# Altium PCB PCB2.PcbDoc
Units mm, origin at the board's own origin, x right, y up, seen from the top; angles counter-clockwise.
Board outline 90.17 x 60.07 mm, 2 copper layers (Top Layer, Bottom Layer); 25 components, 33 nets, 135 pads, 1 vias.
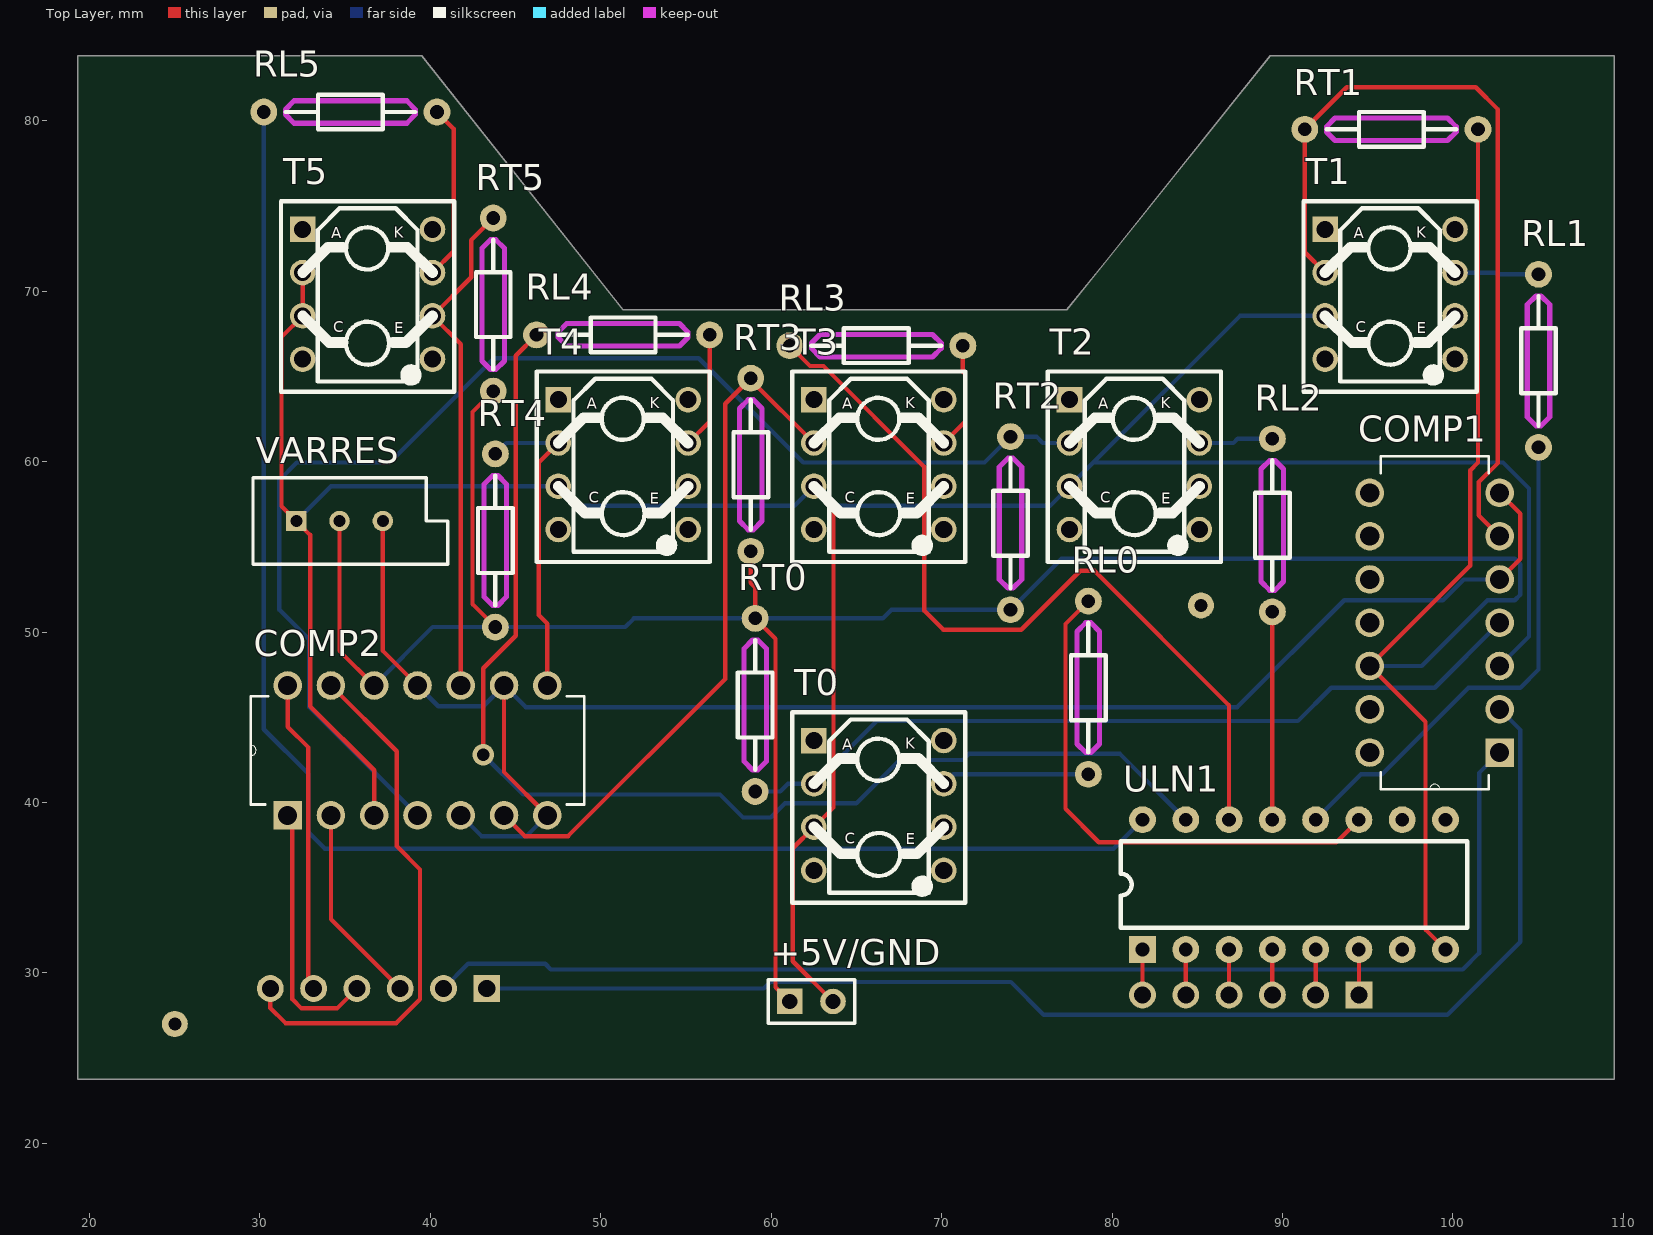
[diagram p0: Top Layer view]
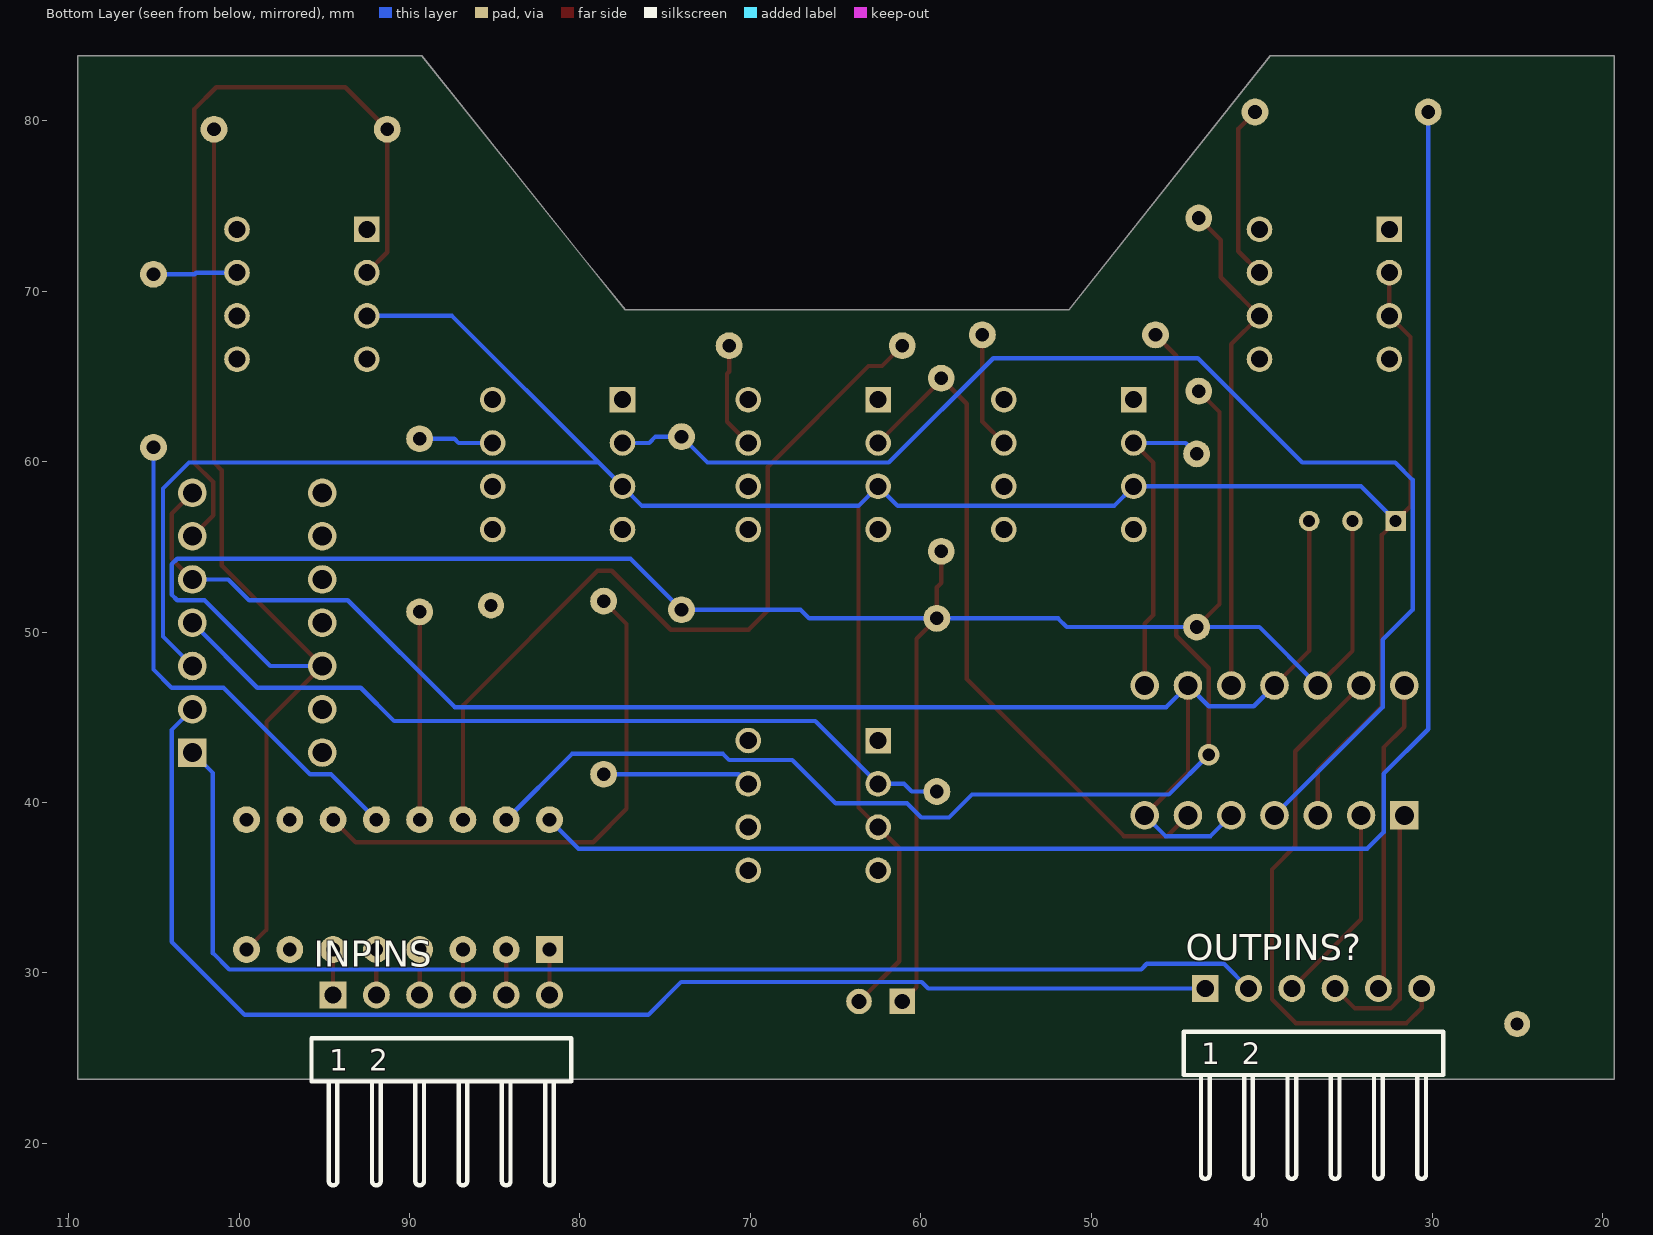
[diagram p1: Bottom Layer view, seen from below]
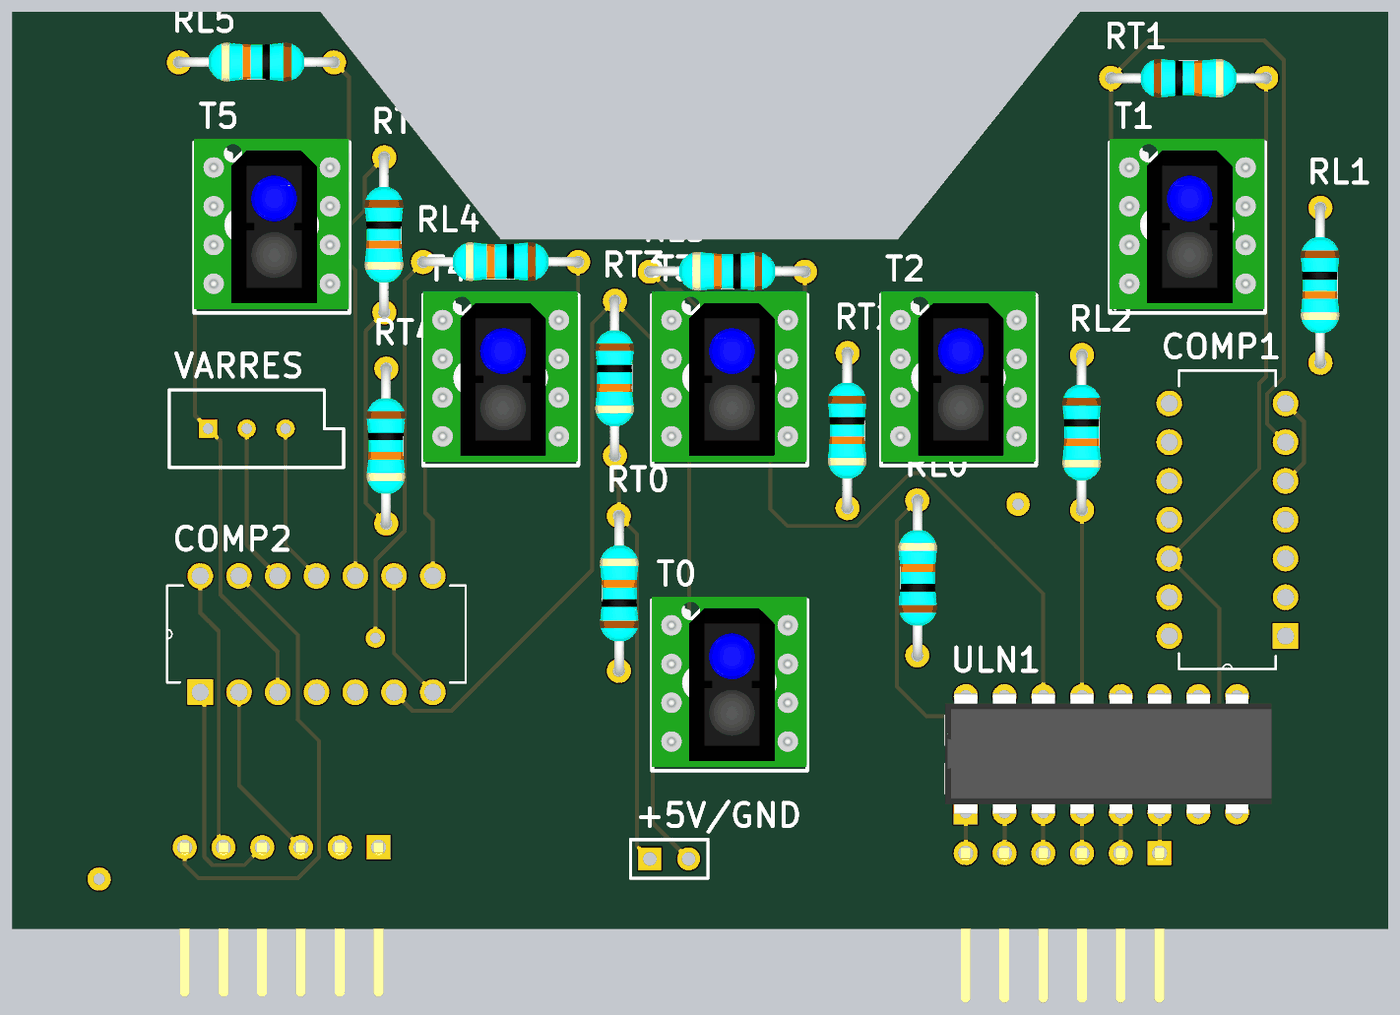
[diagram p2: 3D render of the assembled board from above, using the file's embedded part models]

## Layer stack, top to bottom
Top Solder: solder mask 0.0102, Solder Resist, Dk 3.5
Top Layer: signal copper 0.0356
Dielectric 1: dielectric 0.32, FR-4, Dk 4.8
Bottom Layer: signal copper 0.0356
Bottom Solder: solder mask 0.0102, Solder Resist, Dk 3.5

## Board outline
19.304,23.749 109.474,23.749 109.474,83.82 89.281,83.82 79.701,71.827 77.343,68.91 51.308,68.91 39.497,83.82 19.304,83.82

## Design rules (kind name [scope] priority, off if disabled: settings)
Clearance [All] p1: gap=0.254
PolygonConnect [All] p1: connectstyle=Relief reliefconductorwidth=0.254 reliefentries=4 polygonreliefangle="90 Angle" airgapwidth=0.254
RoomDefinition Sheet1 [InComponentClass('Sheet1')] p1: confinementstyle=ConfineIn formatcopy=TRUE lockcomponents=FALSE outline 19.304,78.486 244.983,78.486 244.983,102.743 19.304,102.743
RoutingVias [All] p1: holewidth=0.711 width=1.27 viastyle="Through Hole" minholewidth=0.711 minwidth=1.27 maxholewidth=0.711 maxwidth=1.27
SolderMaskExpansion [All] p1: expansion=0.102
Width [All] p1: maxlimit=0.254 minlimit=0.254 preferedwidth=0.254
30 further rules are at their usual default settings.

## Components (designator, comment, footprint, x,y, rotation, side; value= is the part's Value field where it differs from the comment)
+5V/GND "Header 2" HDR1X2 61.087,28.321 r0 top (schematic designator "Power Rail?")
COMP1 "LM339N" DIP254P762X508-14 95.123,58.166 r180 top
COMP2 "LM339N" DIP254P762X508-14 46.863,46.863 r90 top
INPINS "Digital Out" PROGRAMMING-HEADER-MICRO 94.488,28.702 r180 bottom
OUTPINS? "Digital Input" PROGRAMMING-HEADER-MICRO 43.307,29.083 r180 bottom
RL0 "Resistor (IO board)" RESISTOR_10K_TH_QW 78.613,51.816 r270 top
RL1 "Resistor (IO board)" RESISTOR_10K_TH_QW 105.029,60.833 r90 top
RL2 "Resistor (IO board)" RESISTOR_10K_TH_QW 89.408,51.181 r90 top
RL3 "Resistor (IO board)" RESISTOR_10K_TH_QW 61.087,66.802 r0 top
RL4 "Resistor (IO board)" RESISTOR_10K_TH_QW 46.228,67.437 r0 top
RL5 "Resistor (IO board)" RESISTOR_10K_TH_QW 30.226,80.518 r0 top
RT0 "Resistor (IO board)" RESISTOR_10K_TH_QW 59.055,50.8 r270 top
RT1 "Resistor (IO board)" RESISTOR_10K_TH_QW 101.473,79.502 r180 top
RT2 "Resistor (IO board)" RESISTOR_10K_TH_QW 74.041,51.308 r90 top
RT3 "Resistor (IO board)" RESISTOR_10K_TH_QW 58.801,54.737 r90 top
RT4 "Resistor (IO board)" RESISTOR_10K_TH_QW 43.815,50.292 r90 top
RT5 "Resistor (IO board)" RESISTOR_10K_TH_QW 43.688,64.135 r90 top
T0 "TCRT0" "TCRT5000 Breakout" 64.304,41.749 r0 top
T1 "TCRT1" "TCRT5000 Breakout" 94.304,71.749 r0 top
T2 "TCRT2" "TCRT5000 Breakout" 79.304,61.749 r0 top
T3 "TCRT3" "TCRT5000 Breakout" 64.304,61.749 r0 top
T4 "T4" "TCRT5000 Breakout" 49.304,61.749 r0 top
T5 "TCRT5" "TCRT5000 Breakout" 34.304,71.749 r0 top
ULN1 "ULN2003" "DILP-16(300) - 3D" 81.788,31.369 r90 top
VARRES "RPot" VR5 34.671,56.515 r0 top

## Footprints (in the part's own frame and the unit in brackets; to place one, negate y for a bottom-side part, rotate by r counter-clockwise, add the part's x,y. Pads: shape width x height; smd on the part's side, far side on the other; paste and mask are expansions set on the pad)
"DILP-16(300) - 3D" [mil]
  rect 62x62 hole 31.5: 1(0,0)
  round 62 hole 31.5: 2(0,-100) 3(0,-200) 4(0,-300) 5(0,-400) 6(0,-500) 7(0,-600) 8(0,-700) 9(300,-700) 10(300,-600) 11(300,-500) 12(300,-400) 13(300,-300) 14(300,-200) 15(300,-100) 16(300,0)
  silkscreen extent 50,-750 250,50, body extent -4,-789 306,53, height 200
DIP254P762X508-14 [mil]
  rect 66x66 hole 44: 1(-300,600)
  round 66 hole 44: 2(-300,500) 3(-300,400) 4(-300,300) 5(-300,200) 6(-300,100) 7(-300,0) 8(0,0) 9(0,100) 10(0,200) 11(0,300) 12(0,400) 13(0,500) 14(0,600)
  silkscreen extent -275,-85 -25,685
HDR1X2 [mm] "Connector; Header; 2 Position"
  rect 1.5x1.5 hole 0.9: 1(0,0)
  round 1.5 hole 0.9: 2(2.54,0)
  silkscreen extent -1.27,-1.27 3.81,1.27
PROGRAMMING-HEADER-MICRO [mil]
  rect 62x62 hole 39.37: 1(0,0)
  round 62 hole 39.37: 2(100,0) 3(200,0) 4(300,0) 5(400,0) 6(500,0)
  silkscreen extent -50,-440 550,-100, body extent -50,-385 550,13, height 99
RESISTOR_10K_TH_QW [mil]
  round 62 hole 31.5: 1(0,0) 2(400,0)
  Top Layer keep-out lines w12: 330,-26 70,-26 50,-6 50,6 70,26 330,26 350,6 350,-6 330,-26
  silkscreen extent 50,-40 350,40, body extent -12,-49 412,51, height 103
"TCRT5000 Breakout" [mm]
  rect 1.5x1.5 hole 1: 1(-1.799,1.884)
  round 1.5 hole 1: 2(-1.799,-0.656) 3(-1.799,-3.196) 4(-1.799,-5.736) 5(5.821,-5.736) 6(5.821,-3.196) 7(5.821,-0.656) 8(5.821,1.884)
  silkscreen extent -3.07,-7.64 7.09,3.54, body extent -3.09,-7.41 7.09,3.77, height 10.11
VR5 [mm] "Thru-Hole; 3 Leads"
  rect 1.2x1.2 hole 0.7: 1(-2.54,0)
  round 1.2 hole 0.7: 2(0,0) 3(2.54,0)
  silkscreen extent -5.08,-2.54 6.35,2.54

## Part data
+5V/GND: "Header, 2-Pin"
INPINS OUTPINS?: library part "Header 6", "Header, 6-Pin"
RL0 RL1 RL2 RL3 RL4 RL5 RT0 RT1 RT2 RT3 RT4 RT5: library part "Resistor(IO board)", "Resistor (SFR25)"
T0 T1 T2 T3 T4 T5: library part "TCRT5000(On PCB)", "4-Pin Phototransistor Optocoupler"
ULN1: "Darlington Transistor Array"
VARRES: "Potentiometer"

## Free pads (board coordinates)
  round 1.524 hole 0.762: 0(25,27) 1(85.217,51.562)

## Via types
v1: diameter 1.27, hole 0.711, Top Layer to Bottom Layer, 1 vias

## Nets (pads, with @x,y where several pads share a name; then routed paths per layer and width w, separated by ;. In a path a pad name is that pad's centre, name@x,y a point inside that pad or via, vN(x,y) a via of type N, cw(c..) or ccw(c..) an arc to the next point about the centre after c; other vN are vias at no path point)
NetCOMP1_1: COMP1.1 OUTPINS?.2 | length 74.2
  Bottom Layer w0.254: OUTPINS?.2 42.215,30.531 46.736,30.531 47.066,30.201 100.584,30.201 101.541,31.158 101.541,41.724 COMP1.1
NetCOMP1_2: COMP1.2 OUTPINS?.1 | length 77.5
  Bottom Layer w0.254: OUTPINS?.1 59.563,29.083 59.944,29.464 74.066,29.464 75.997,27.534 99.67,27.534 103.962,31.826 103.962,44.247 COMP1.2
NetCOMP1_3: +5V/GND.2 COMP1.3 COMP2.3 T0.3 T1.3 T2.3 T3.3 T4.3 T5.2 T5.3 VARRES.1 | length 171.9
  Top Layer w0.254: T5.2 T5.3 31.267,67.315 31.267,57.379 VARRES.1 32.944,55.702 32.944,45.644 36.703,41.885 COMP2.3 ; T3.3 63.652,57.406 63.652,39.7 T0.3 61.265,37.313 61.265,30.683 +5V/GND.2
  Bottom Layer w0.254: VARRES.1 34.169,58.553 T4.3 48.654,57.404 61.356,57.404 T3.3 63.654,57.404 76.356,57.404 T2.3 78.896,59.944 ; T1.3 87.505,68.553 78.896,59.944 ; COMP1.3 104.47,49.733 104.47,58.42 102.946,59.944 78.896,59.944
NetCOMP1_4: COMP1.4 RT0.2 T0.2 | length 47.8
  Bottom Layer w0.254: RT0.2 60.528,40.64 60.981,41.093 T0.2 66.192,44.78 90.907,44.78 92.862,46.736 98.933,46.736 COMP1.4
NetCOMP1_5: COMP1.5 COMP1.7 COMP2.5 COMP2.7 COMP2.9 COMP2.11 VARRES.3 | length 99.5
  Top Layer w0.254: VARRES.3 37.211,48.895 COMP2.11 ; COMP2.9 44.323,41.783 COMP2.7 ; COMP1.5 103.962,54.305 103.962,56.947 COMP1.7
  Bottom Layer w0.254: COMP2.11 40.462,45.644 43.104,45.644 COMP2.9 45.593,45.593 87.351,45.593 93.624,51.867 99.416,51.867 100.635,53.086 COMP1.5 ; COMP2.5 43.002,38.024 45.644,38.024 COMP2.7
NetCOMP1_6: COMP1.6 RT1.2 T1.2 | length 47.8
  Top Layer w0.254: T1.2 91.313,72.285 RT1.2 93.777,81.966 101.346,81.966 102.641,80.67 102.641,59.919 101.524,58.801 101.524,56.845 COMP1.6
NetCOMP1_12: +5V/GND.1 COMP1.12 COMP2.12 RT0.1 RT1.1 RT2.1 RT3.1 RT4.1 RT5.1 ULN1.8 VARRES.2 | length 188.2
  Top Layer w0.254: VARRES.2 34.671,48.895 COMP2.12 ; RT5.1 42.469,62.916 42.469,51.638 RT4.1 ; RT3.1 58.801,52.883 59.055,52.629 RT0.1 60.249,49.606 60.249,29.159 +5V/GND.1 ; ULN1.8 98.4,32.537 98.4,44.729 COMP1.12 101.016,53.899 101.016,59.487 101.473,59.944 RT1.1
  Bottom Layer w0.254: COMP2.12 40.132,50.292 RT4.1 51.435,50.292 51.943,50.8 RT0.1 66.548,50.8 67.056,51.308 RT2.1 77.038,54.305 103.632,54.305 103.962,53.975 103.962,52.197 103.632,51.867 102.032,51.867 98.171,48.006 COMP1.12
NetCOMP2_1: COMP2.1 OUTPINS?.4 | length 15.6
  Top Layer w0.254: COMP2.1 31.902,39.243 31.902,28.448 32.436,27.915 34.519,27.915 OUTPINS?.4
NetCOMP2_2: COMP2.2 OUTPINS?.3 | length 11.8
  Top Layer w0.254: COMP2.2 34.163,33.147 OUTPINS?.3
NetCOMP2_4: COMP2.4 RT2.2 T2.2 | length 75.7
  Bottom Layer w0.254: COMP2.4 32.893,45.593 32.893,49.555 31.14,51.308 31.14,58.928 32.156,59.944 37.617,59.944 43.739,66.065 55.753,66.065 61.874,59.944 72.517,59.944 RT2.2 75.565,61.468 75.94,61.093 T2.2
NetCOMP2_6: COMP2.6 RT3.2 T3.2 | length 40.9
  Top Layer w0.254: COMP2.6 45.542,38.024 48.082,38.024 57.302,47.244 57.302,63.398 RT3.2 58.801,64.797 T3.2
NetCOMP2_8: COMP2.8 RT4.2 T4.2 | length 18.9
  Top Layer w0.254: COMP2.8 46.863,50.495 46.355,51.003 46.355,59.943 T4.2
  Bottom Layer w0.254: RT4.2 44.456,61.093 T4.2
NetCOMP2_10: COMP2.10 RT5.2 T5.6 | length 29.6
  Top Layer w0.254: COMP2.10 41.783,66.895 T5.6 42.393,70.821 42.393,73 RT5.2
NetCOMP2_13: COMP2.13 OUTPINS?.6 | length 31.5
  Top Layer w0.254: OUTPINS?.6 30.607,27.94 31.496,27.051 37.998,27.051 39.395,28.448 39.395,36.068 38.024,37.44 38.024,43.002 COMP2.13
NetCOMP2_14: COMP2.14 OUTPINS?.5 | length 18.6
  Top Layer w0.254: COMP2.14 31.623,44.441 32.842,43.222 32.842,29.083 OUTPINS?.5
NetINPINS_1: INPINS.1 ULN1.6 | length 2.7
  Top Layer w0.254: INPINS.1 ULN1.6
NetINPINS_2: INPINS.2 ULN1.5 | length 2.7
  Top Layer w0.254: INPINS.2 ULN1.5
NetINPINS_3: INPINS.3 ULN1.4 | length 2.7
  Top Layer w0.254: INPINS.3 ULN1.4
NetINPINS_4: INPINS.4 ULN1.3 | length 2.7
  Top Layer w0.254: INPINS.4 ULN1.3
NetINPINS_5: INPINS.5 ULN1.2 | length 2.7
  Top Layer w0.254: INPINS.5 ULN1.2
NetINPINS_6: INPINS.6 ULN1.1 | length 2.7
  Top Layer w0.254: INPINS.6 ULN1.1
NetRL0_1: RL0.1 ULN1.11 | length 31.3
  Top Layer w0.254: RL0.1 77.267,50.47 77.267,39.624 79.223,37.668 93.167,37.668 ULN1.11
NetRL0_2: RL0.2 T0.7 | length 8.7
  Bottom Layer w0.254: T0.7 70.688,41.656 RL0.2
NetRL1_1: RL1.1 ULN1.12 | length 29.8
  Bottom Layer w0.254: ULN1.12 94.615,41.656 95.834,41.656 100.914,46.736 103.962,46.736 105.029,47.803 RL1.1
NetRL1_2: RL1.2 T1.7 | length 4.9
  Bottom Layer w0.254: T1.7 102.514,71.093 102.614,70.993 RL1.2
NetRL2_1: RL2.1 ULN1.13 | length 12.2
  Top Layer w0.254: ULN1.13 RL2.1
NetRL2_2: RL2.2 T2.7 | length 4.4
  Bottom Layer w0.254: T2.7 87.122,61.093 87.37,61.341 RL2.2
NetRL3_1: RL3.1 ULN1.14 | length 49
  Top Layer w0.254: RL3.1 62.281,65.608 63.068,65.608 68.986,59.69 68.986,51.257 70.104,50.14 74.676,50.14 78.13,53.594 78.969,53.594 86.868,45.695 ULN1.14
NetRL3_2: RL3.2 T3.7 | length 6.3
  Top Layer w0.254: T3.7 71.374,62.342 71.374,65.151 71.247,65.278 RL3.2
NetRL4_1: RL4.1 ULN1.15 | length 71.8
  Top Layer w0.254: v1(43.104,42.799) 43.104,47.879 45.009,49.784 45.009,66.218 RL4.1
  Bottom Layer w0.254: v1(43.104,42.799) 45.441,40.462 56.998,40.462 58.344,39.116 59.969,39.116 60.808,39.954 64.999,39.954 67.539,42.494 71.247,42.494 71.603,42.85 80.467,42.85 ULN1.15
NetRL4_2: RL4.2 T4.7 | length 6.9
  Top Layer w0.254: T4.7 56.388,62.356 RL4.2
NetRL5_1: RL5.1 ULN1.16 | length 93.4
  Bottom Layer w0.254: RL5.1 30.226,44.298 32.842,41.681 32.842,38.252 33.807,37.287 80.086,37.287 ULN1.16
NetRL5_2: RL5.2 T5.7 | length 10.4
  Top Layer w0.254: T5.7 41.377,72.345 41.377,79.527 RL5.2
pads on no net: COMP1.8 COMP1.9 COMP1.10 COMP1.11 COMP1.13 COMP1.14 T0.1 T0.4 T0.5 T0.6 T0.8 T1.1 T1.4 T1.5 T1.6 T1.8 T2.1 T2.4 T2.5 T2.6 T2.8 T3.1 T3.4 T3.5 T3.6 T3.8 T4.1 T4.4 T4.5 T4.6 T4.8 T5.1 T5.4 T5.5 T5.8 ULN1.7 ULN1.9 ULN1.10

## Text inside footprints (layer, text, board x,y; h text height)
INPINS: Bottom Overlay "1" at 94.717,24.257 h1.27; Bottom Overlay "2" at 92.354,24.257 h1.27
OUTPINS?: Bottom Overlay "1" at 43.536,24.638 h1.27; Bottom Overlay "2" at 41.173,24.638 h1.27
T0: Top Overlay "A" at 64.177,43.095 h0.64; Top Overlay "K" at 67.86,43.146 h0.64; Top Overlay "C" at 64.304,37.583 h0.64; Top Overlay "E" at 67.885,37.533 h0.64
T1: Top Overlay "A" at 94.177,73.095 h0.64; Top Overlay "K" at 97.86,73.146 h0.64; Top Overlay "C" at 94.304,67.583 h0.64; Top Overlay "E" at 97.885,67.533 h0.64
T2: Top Overlay "A" at 79.177,63.095 h0.64; Top Overlay "K" at 82.86,63.146 h0.64; Top Overlay "C" at 79.304,57.583 h0.64; Top Overlay "E" at 82.885,57.533 h0.64
T3: Top Overlay "A" at 64.177,63.095 h0.64; Top Overlay "K" at 67.86,63.146 h0.64; Top Overlay "C" at 64.304,57.583 h0.64; Top Overlay "E" at 67.885,57.533 h0.64
T4: Top Overlay "A" at 49.177,63.095 h0.64; Top Overlay "K" at 52.86,63.146 h0.64; Top Overlay "C" at 49.304,57.583 h0.64; Top Overlay "E" at 52.885,57.533 h0.64
T5: Top Overlay "A" at 34.177,73.095 h0.64; Top Overlay "K" at 37.86,73.146 h0.64; Top Overlay "C" at 34.304,67.583 h0.64; Top Overlay "E" at 37.885,67.533 h0.64